# Altium PCB ArduinoProMiniPCB.PcbDoc
Units mil, origin at the board's own origin, x right, y up, seen from the top; angles counter-clockwise.
Board outline 6000 x 4000 mil, 2 copper layers (Top Layer, Bottom Layer); 50 components, 43 nets, 167 pads, 0 vias.
Unrouted connection lines stored in the file: 67.
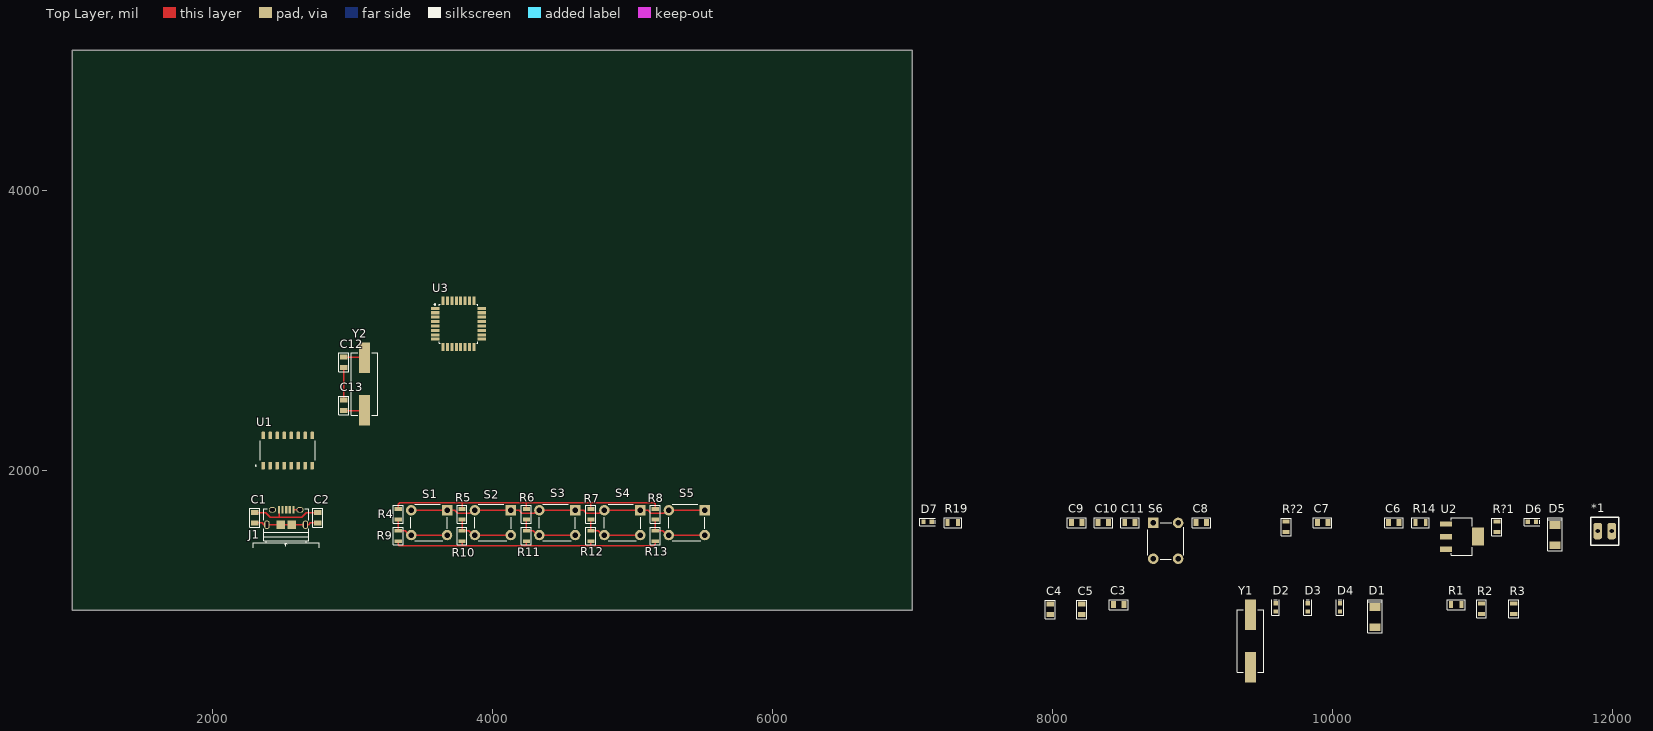
[diagram p0: Top Layer view]
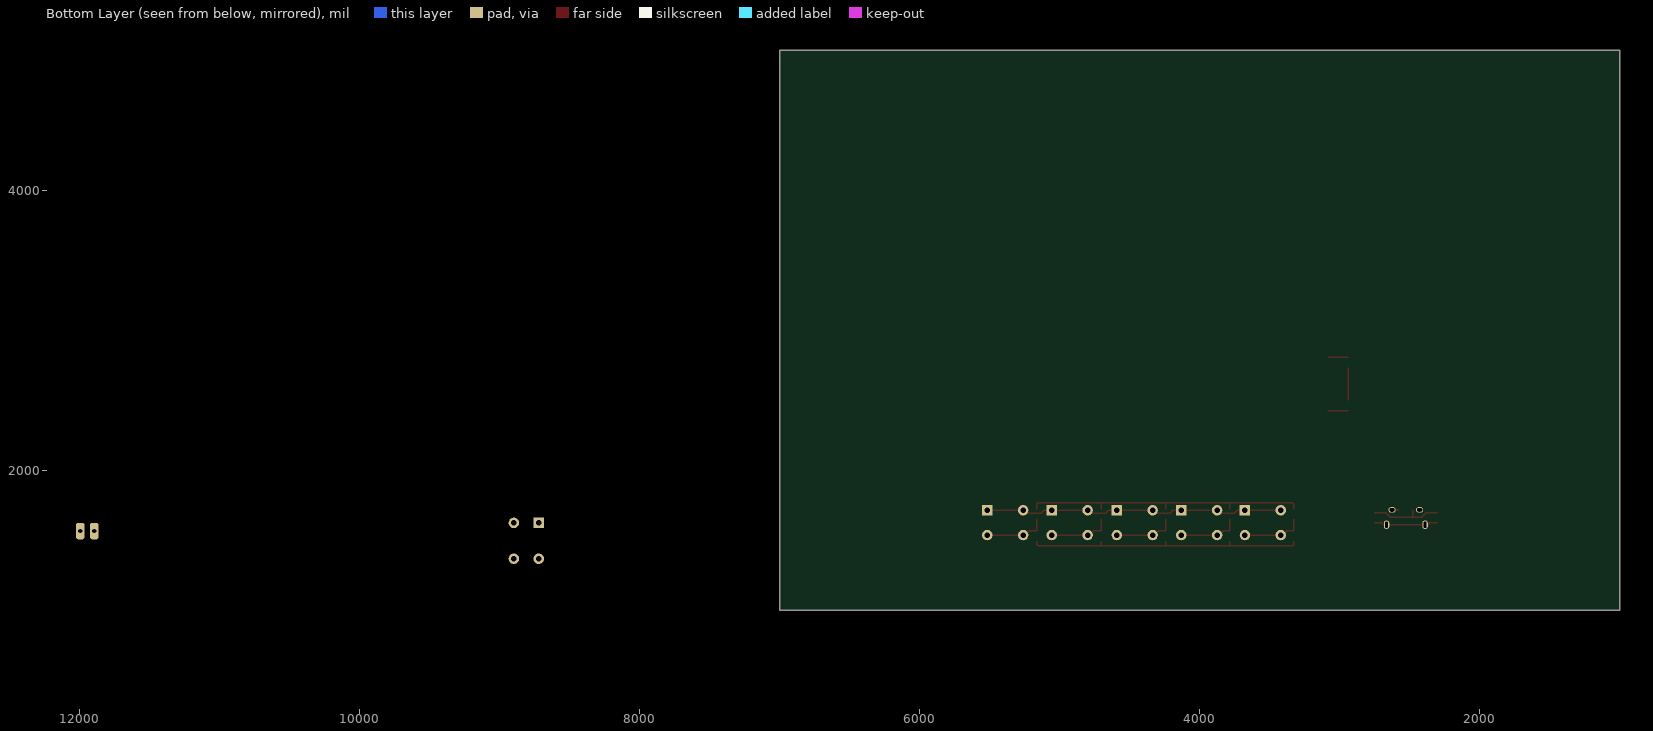
[diagram p1: Bottom Layer view, seen from below]

## Layer stack, top to bottom
Top Solder: solder mask 0.4, Solder Resist, Dk 3.5
Top Layer: signal copper 1.4
Dielectric 1: dielectric 12.6, FR-4, Dk 4.8
Bottom Layer: signal copper 1.4
Bottom Solder: solder mask 0.4, Solder Resist, Dk 3.5

## Board outline
1000,1000 7000,1000 7000,5000 1000,5000

## Design rules (kind name [scope] priority, off if disabled: settings)
Clearance [All] p1: gap=10 ignorepadtopadclearanceinfootprint=FALSE
PolygonConnect [All] p1: connectstyle=Relief reliefconductorwidth=10 reliefentries=4 polygonreliefangle="90 Angle" airgapwidth=10
RoutingVias [All] p1: holewidth=28 width=50 viastyle="Through Hole" minholewidth=28 minwidth=50 maxholewidth=28 maxwidth=50
SolderMaskExpansion [All] p1: expansion=4 istentingtop=FALSE
SupplyNets "Schematic Supply Nets_1" [InNet('GND')] p1: voltage=0.000
SupplyNets "Schematic Supply Nets" [InNet('+5')] p2: voltage=0.000
Width [All] p1: maxlimit=10 minlimit=10 preferedwidth=10
30 further rules are at their usual default settings.

## Components (designator, comment, footprint, x,y, rotation, side; value= is the part's Value field where it differs from the comment)
*1 "Power_Connector" Power_Connector 11895,1565 r0 top (schematic designator *)
C1 "100nF /50V" "C 0805" 2305,1660 r90 top
C2 "10uF/ 16V" "C 0805" 2755,1660 r90 top
C3 "100nF /50V" "C 0805" 8475,1040 r0 top (schematic designator C)
C4 "22pF /50V" "C 0805" 7985,1005 r90 top (schematic designator C)
C5 "22pF /50V" "C 0805" 8210,1005 r90 top (schematic designator C)
C6 "10uF/ 16V" "C 0805" 10440,1625 r0 top (schematic designator C3)
C7 "10uF/ 16V" "C 0805" 9930,1625 r0 top (schematic designator C4)
C8 "100nF /50V" "C 0805" 9065,1625 r0 top (schematic designator C5)
C9 "100nF /50V" "C 0805" 8175,1625 r0 top (schematic designator C6)
C10 "100nF /50V" "C 0805" 8365,1625 r0 top (schematic designator C7)
C11 "100nF /50V" "C 0805" 8555,1625 r0 top (schematic designator C8)
C12 "18pF /50V" "C 0805" 2940,2770 r90 top (schematic designator C9)
C13 "18pF /50V" "C 0805" 2940,2462.4 r270 top (schematic designator C10)
D1 "1N4148UR-1" DO-213AA 10305,950 r90 top (schematic designator D)
D2 "LED RED" "LED 0603" 9595,1020 r90 top (schematic designator D)
D3 "LED RED" "LED 0603" 9825,1020 r90 top (schematic designator D)
D4 "LED BLUE" "LED 0603" 10055,1020 r90 top (schematic designator D)
D5 "1N4148UR-1" DO-213AA 11590,1535 r90 top (schematic designator D1)
D6 "LED Blue" "LED 0603" 11425,1630 r0 top (schematic designator D2)
D7 "LED WHITE" "LED 0603" 7110,1630 r0 top (schematic designator D3)
J1 "10118194-0001LF" 10118194-0001LF 2529.37,1663.15 r0 top
R1 "330R" "R 0805" 10885,1040 r0 top (schematic designator R)
R2 "330R" "R 0805" 11065,1010 r90 top (schematic designator R)
R3 "330R" "R 0805" 11295,1010 r90 top (schematic designator R)
R4 "10kR" "R 0805" 3330,1685 r90 top (schematic designator R1)
R5 "10kR" "R 0805" 3785,1685 r90 top (schematic designator R2)
R6 "10kR" "R 0805" 4245,1685 r90 top (schematic designator R3)
R7 "10kR" "R 0805" 4705,1685 r90 top (schematic designator R4)
R8 "10kR" "R 0805" 5165,1685 r90 top (schematic designator R5)
R9 "10kR" "R 0805" 3330,1530 r90 top (schematic designator R6)
R10 "10kR" "R 0805" 3785,1530 r90 top (schematic designator R7)
R11 "10kR" "R 0805" 4245,1530 r90 top (schematic designator R8)
R12 "10kR" "R 0805" 4705,1530 r90 top (schematic designator R9)
R13 "10kR" "R 0805" 5165,1530 r90 top (schematic designator R10)
R14 "330R" "R 0805" 10630,1625 r0 top (schematic designator R11)
R19 "330R" "R 0805" 7290,1625 r0 top (schematic designator R16)
R?1 "10kR" "R 0805" 11175,1595 r90 top (schematic designator R?)
R?2 "10kR" "R 0805" 9670,1595 r90 top (schematic designator R?)
S1 "1825910-6" 1825910-6 3550,1625 r270 top
S2 "1825910-6" 1825910-6 4005,1625 r270 top
S3 "1825910-6" 1825910-6 4465,1625 r270 top
S4 "1825910-6" 1825910-6 4930,1625 r270 top
S5 "1825910-6" 1825910-6 5390,1625 r270 top
S6 "1825910-6" 1825910-6 8810,1495 r0 top
U1 "CH340G" SOIC127P600X180-16N 2540,2140 r90 top (schematic designator U)
U2 "LM1117MPX33NOPB" SOT223 10925,1525 r0 top (schematic designator U1)
U3 "ATMEGA328P-AUR" TQFP-32 3760,3045 r0 top (schematic designator U2)
Y1 "12MHz" CSM-7X 9415,780 r90 top (schematic designator Y)
Y2 "8MHz" CSM-7X 3090,2615 r270 top (schematic designator Y1)

## Footprints (in the part's own frame and the unit in brackets; to place one, negate y for a bottom-side part, rotate by r counter-clockwise, add the part's x,y. Pads: shape width x height; smd on the part's side, far side on the other; paste and mask are expansions set on the pad)
1825910-6 [mm]
  rect 1.9x1.9 / inner rect 19x1.9 / far side rect 1.9x1.9 hole 1: 1(-2.25,3.25)
  round 1.9 / inner oval 19x1.9 / far side round 1.9 hole 1: 2(-2.25,-3.25) 3(2.25,-3.25) 4(2.25,3.25)
  silkscreen extent -3.3,-3.3 3.3,3.3, body extent -3,-3.9 2.99,3.9, height 5
10118194-0001LF [mm]
  rect 0.4x1.35 smd mask+0.06: 1(-1.3,1.35) 2(-0.65,1.35) 3(0,1.35) 4(0.65,1.35) 5(1.3,1.35)
  oval 1.3x1 hole 0.6 slot 0.9 at 0 deg mask+0.06: 6(-2.5,1.35) 7(2.5,1.35)
  oval 1x1.55 hole 0.5 slot 1.15 at 90 deg mask+0.06: 8(-3.5,-1.35) 9(3.5,-1.35)
  rect 1.5x1.5 smd mask+0.06: 10(-1,-1.35) 11(1,-1.35)
  silkscreen extent -6,-5.55 6,1.55, body extent -4.05,-4.2 4,1.5, height 2.77
"C 0805" [mm]
  rect 0.9x1.3 smd: 1(-0.95,0) 2(0.95,0)
  silkscreen extent -1.7,-0.9 1.7,0.9, body extent -1,-0.65 1,0.64, height 1.3
CSM-7X [mm]
  rect 5.5x2 smd: 1(-4.75,0) 2(4.75,0)
  silkscreen extent -5.7,-2.4 5.7,2.4, body extent -6.6,-2.4 6.6,2.4, height 4.31
DO-213AA [mm]
  rect 1.4x2.03 smd: 1(-1.84,0) 2(1.84,0)
  silkscreen extent -2.8,-1.3 3.2,1.3, body extent -1.82,-0.8 1.88,0.8, height 1.6
"LED 0603" [mm]
  rect 0.8x0.8 smd: 1(-0.75,0) 2(0.75,0)
  silkscreen extent -1.4,-0.7 1.4,0.7, body extent -0.83,-0.37 0.83,0.36, height 0.68
Power_Connector [mil]
  rrect50% 60x118.11 hole 30 unplated paste-99999: 1(0,0)
  rrect50% 60x118.11 hole 30 unplated: 2(100,0)
  silkscreen extent -50,-100 150,100
"R 0805" [mm]
  rect 0.7x1.3 smd: 1(-0.95,0) 2(0.95,0)
  silkscreen extent -1.6,-0.9 1.6,0.9, body extent -1,-0.62 1,0.62, height 0.61
SOIC127P600X180-16N [mm]
  rrect25% 1.31x0.62 smd: 1(-2.75,4.445) 2(-2.75,3.175) 3(-2.75,1.905) 4(-2.75,0.635) 5(-2.75,-0.635) 6(-2.75,-1.905) 7(-2.75,-3.175) 8(-2.75,-4.445) 9(2.75,-4.445) 10(2.75,-3.175) 11(2.75,-1.905) 12(2.75,-0.635) 13(2.75,0.635) 14(2.75,1.905) 15(2.75,3.175) 16(2.75,4.445)
  silkscreen extent -2.85,-5 1.78,5.85, body extent -3,-5 3,5, height 1.8
SOT223 [mm]
  rect 2.15x0.95 smd: 1(-2.9,2.3) 2(-2.9,0) 3(-2.9,-2.3)
  rect 2.15x3.25 smd: 4(2.9,0)
  silkscreen extent -1.9,-3.4 1.9,3.4, body extent -3.5,-3.25 3.5,3.25, height 1.66
TQFP-32 [mm]
  rect 1.5x0.55 smd mask+0.06: 1(-4.2,2.8) 2(-4.2,2) 3(-4.2,1.2) 4(-4.2,0.4) 5(-4.2,-0.4) 6(-4.2,-1.2) 7(-4.2,-2) 8(-4.2,-2.8) 17(4.2,-2.8) 18(4.2,-2) 19(4.2,-1.2) 20(4.2,-0.4) 21(4.2,0.4) 22(4.2,1.2) 23(4.2,2) 24(4.2,2.8)
  rect 0.55x1.5 smd mask+0.06: 9(-2.8,-4.2) 10(-2,-4.2) 11(-1.2,-4.2) 12(-0.4,-4.2) 13(0.4,-4.2) 14(1.2,-4.2) 15(2,-4.2) 16(2.8,-4.2) 25(2.8,4.2) 26(2,4.2) 27(1.2,4.2) 28(0.4,4.2) 29(-0.4,4.2) 30(-1.2,4.2) 31(-2,4.2) 32(-2.8,4.2)
  silkscreen extent -4.4,-3.5 3.5,3.6, body extent -4.51,-4.51 4.51,4.51, height 1.1

## Part data
C1 C3 C8 C9 C10 C11: library part C0805C104Z5VACTU, "KEMET         C0805C104Z5VACTU.             CERAMIC CAPACITOR, 0.1UF, 50V, Y5V, +80,-20%, 0805", Capacitance=100nF, Case Code (Imperial)=0805, Case Code (Metric)=2012, Dielectric=Y5V, Dielectric Material=Ceramic, Manufacturer 1=KEMET, Max Operating Temperature=85°C, Min Operating Temperature=-30°C, Package Quantity=1, Supplier Part Number 1=399-1177-1-ND, Tolerance=80%, Voltage=50V, Case/Package=0805, Category="Ceramic Capacitors", ComponentLink1Description=https://datasheet.ciiva.com/14597/70095383-14597846.pdf?src-supplier=Allied+Electronics, ComponentLink1URL=https://datasheet.ciiva.com/14597/70095383-14597846.pdf?src-supplier=Allied+Electronics, ComponentLink2Description=https://datasheet.ciiva.com/18219/getdatasheetpartid-37101-18219255.pdf?src-supplier=Verical, ComponentLink2URL=https://datasheet.ciiva.com/18219/getdatasheetpartid-37101-18219255.pdf?src-supplier=Verical, ComponentLink3Description=https://datasheet.ciiva.com/26847/getdatasheetpartid-321176-26847799.pdf?src-supplier=Verical, ComponentLink3URL=https://datasheet.ciiva.com/26847/getdatasheetpartid-321176-26847799.pdf?src-supplier=Verical, ComponentLink4Description=https://datasheet.ciiva.com/14608/70095383-14608251.pdf?src-supplier=Allied+Electronics, ComponentLink4URL=https://datasheet.ciiva.com/14608/70095383-14608251.pdf?src-supplier=Allied+Electronics, ComponentLink5Description=https://datasheet.ciiva.com/7842/1470417-7842543.pdf?src-supplier=Element14, ComponentLink5URL=https://datasheet.ciiva.com/7842/1470417-7842543.pdf?src-supplier=Element14, Depth=1.25mm, Dissipation Factor=5%, Height=0.9mm, Lead Free="Lead Free", Lead Pitch=0.75mm, Length=2mm, Manufacturer Part Number 1=C0805C104Z5VACTU, Mount="Surface Mount,PCB", Number of Pins=2, Packaging="Tape and Reel", Pricing 1="1=0.10000, 10=0.05700, 100=0.02540, 500=0.01818, 1000=0.01428 (USD)", Radiation Hardening=No, REACH SVHC="No SVHC", RoHS=Yes, Stock 1=1301254, Supplier 1=Digi-Key, Termination=SMD/SMT, Thickness=0.039inch, Voltage Rating=50V, Voltage Rating (DC)=50V, Width=0.049inch
C2 C6 C7: library part C0805C106K4PACTU, "0805 C 10uF Ceramic Multilayer Capacitor; 16 VDC; +85degC; X5R Dielec; +/-10%", Capacitance=10uF, Case Code (Imperial)=0805, Case Code (Metric)=2012, Dielectric=X5R, Dielectric Material=Ceramic, Manufacturer 1=KEMET, Max Operating Temperature=85°C, Min Operating Temperature=-55°C, Package Quantity=1, Supplier Part Number 1=399-8012-6-ND, Tolerance=10%, Voltage=16V, Case/Package=0805, Category="Ceramic Capacitors", ComponentLink1Description=https://datasheet.ciiva.com/7842/1732713-7842196.pdf?src-supplier=Element14, ComponentLink1URL=https://datasheet.ciiva.com/7842/1732713-7842196.pdf?src-supplier=Element14, ComponentLink2Description=https://datasheet.ciiva.com/28682/1831760-28682305.pdf?src-supplier=Element14, ComponentLink2URL=https://datasheet.ciiva.com/28682/1831760-28682305.pdf?src-supplier=Element14, ComponentLink3Description=https://datasheet.ciiva.com/11787/0900766b8116eb59-11787314.pdf?src-supplier=RSComponents, ComponentLink3URL=https://datasheet.ciiva.com/11787/0900766b8116eb59-11787314.pdf?src-supplier=RSComponents, ComponentLink4Description=https://datasheet.ciiva.com/7842/1732713-7842197.pdf?src-supplier=Element14, ComponentLink4URL=https://datasheet.ciiva.com/7842/1732713-7842197.pdf?src-supplier=Element14, ComponentLink5Description=https://datasheet.ciiva.com/26847/getdatasheetpartid-110990-26847815.pdf?src-supplier=Verical, ComponentLink5URL=https://datasheet.ciiva.com/26847/getdatasheetpartid-110990-26847815.pdf?src-supplier=Verical, Contact Plating=Tin,Matte, Depth=1.25mm, Dissipation Factor=5%, Height=1.25mm, Lead Free="Lead Free", Length=2mm, Manufacturer Part Number 1=C0805C106K4PACTU, Mount="Surface Mount", Number of Pins=2, Packaging="Tape and Reel", Pricing 1="1=0.19000, 10=0.13100, 100=0.06630, 500=0.04538, 1000=0.04015 (USD)", Radiation Hardening=No, REACH SVHC="No SVHC", RoHS=Yes, Stock 1=383500, Supplier 1=Digi-Key, Termination=SMD/SMT, Thickness=0.055inch, Voltage Rating=16V, Voltage Rating (DC)=16V, Width=0.049inch
C4 C5 C12 C13: library part CC0805JRNPO9BN180, "CAP CER 18PF 50V C0G/NPO 0805", Capacitance=18pF, Case Code (Imperial)=0805, Case Code (Metric)=2012, Dielectric=C0G, Insulation Resistance=10GR, Manufacturer 1=Yageo, Max Operating Temperature=125°C, Min Operating Temperature=-55°C, Package Quantity=4000, Supplier Part Number 1=311-1102-1-ND, Tolerance=5%, Voltage Rating=50V, Case/Package=0805, Category="Ceramic Capacitors", ComponentLink1Description=https://datasheet.ciiva.com/26862/getdatasheetpartid-403658-26862933.pdf?src-supplier=Verical, ComponentLink1URL=https://datasheet.ciiva.com/26862/getdatasheetpartid-403658-26862933.pdf?src-supplier=Verical, ComponentLink2Description=https://datasheet.ciiva.com/144/mlccorderingcode-144754.pdf?src-supplier=Digi-Key, ComponentLink2URL=https://datasheet.ciiva.com/144/mlccorderingcode-144754.pdf?src-supplier=Digi-Key, ComponentLink3Description=https://datasheet.ciiva.com/11586/upy-gp-np0-16v-to-50v-8-11586203.pdf?src-supplier=Avnet, ComponentLink3URL=https://datasheet.ciiva.com/11586/upy-gp-np0-16v-to-50v-8-11586203.pdf?src-supplier=Avnet, ComponentLink4Description=https://datasheet.ciiva.com/144/mlccorderingcode-144755.pdf?src-supplier=Digi-Key, ComponentLink4URL=https://datasheet.ciiva.com/144/mlccorderingcode-144755.pdf?src-supplier=Digi-Key, ComponentLink5Description=https://datasheet.ciiva.com/144/mlccorderingcode-144756.pdf?src-supplier=Digi-Key, ComponentLink5URL=https://datasheet.ciiva.com/144/mlccorderingcode-144756.pdf?src-supplier=Digi-Key, ComponentLink6Description=https://datasheet.ciiva.com/29241/445366-da-01-en-kerko-chip-0805-np0-18pf-5proz50v-g-29241990.pdf?src-supplier=Conrad, ComponentLink6URL=https://datasheet.ciiva.com/29241/445366-da-01-en-kerko-chip-0805-np0-18pf-5proz50v-g-29241990.pdf?src-supplier=Conrad, Composition=Ceramic, Depth=1.25mm, Height=0.6mm, Lead Free="Lead Free", Length=2mm, Manufacturer Part Number 1=CC0805JRNPO9BN180, Material=Ceramic, Mount="Surface Mount", Packaging="Tape and Reel", Pricing 1="1=0.11000, 10=0.07900, 100=0.03520, 500=0.02514, 1000=0.01975 (USD)", Radiation Hardening=No, RoHS=Yes, Stock 1=89807, Supplier 1=Digi-Key, Termination=SMD/SMT, Thickness=0.024inch, Voltage Rating (DC)=50V, Width=0.049inch
D1 D5: "Diode Switching 75V 0.2A 2-Pin DO-213AA", Average Rectified Current=200mA, Forward Voltage=1.2V, Manufacturer 1=Microsemi, Max Operating Temperature=175°C, Max Repetitive Reverse Voltage (Vrrm)=75V, Min Operating Temperature=-65°C, Peak Non-Repetitive Surge Current=2A, Peak Reverse Current=500nA, Supplier Part Number 1=1N4148UR-1-ND, Category="Rectifier Diodes", ComponentLink1Description=https://datasheet.ciiva.com/3304/lds-0281-1-3304223.pdf?src-supplier=Avnet, ComponentLink1URL=https://datasheet.ciiva.com/3304/lds-0281-1-3304223.pdf?src-supplier=Avnet, Element Configuration=Single, Forward Current=200mA, Lead Free="Lead Free", Manufacturer Part Number 1=1N4148UR-1, Max Reverse Voltage (DC)=75V, Mount="Surface Mount", Number of Pins=2, Packaging=Bulk, Pricing 1="1=1.50000, 10=1.35200, 100=1.08630, 500=0.89250, 1000=0.73950, 2500=0.71400 (USD)", Radiation Hardening=No, Reverse Recovery Time=5ns, RoHS=Yes, Stock 1=470, Supplier 1=Digi-Key
D2 D3 D4 D7: library part IN-S63AT5UW, "LED WHITE CLEAR 0603 SMD", Manufacturer 1=Inolux, Supplier Part Number 1=1830-1063-1-ND, Category=LEDs, ComponentLink1Description=http://www.inolux-corp.com/datasheet/SMDLED/Mono%20Color%20Top%20View/IN-S63AT%20Series_V1.1.pdf?src-supplier=Digi-Key, ComponentLink1URL=http://www.inolux-corp.com/datasheet/SMDLED/Mono%20Color%20Top%20View/IN-S63AT%20Series_V1.1.pdf?src-supplier=Digi-Key, Manufacturer Part Number 1=IN-S63AT5UW, Pricing 1="1=0.35000, 10=0.25400, 100=0.12040, 500=0.08026, 1000=0.06286 (USD)", RoHS=No, Stock 1=55075, Supplier 1=Digi-Key
D6: library part LTST-C194TBKT, "LED BLUE CLEAR SMD", Case Code (Imperial)=0603, Case Code (Metric)=1608, Color=Blue, Forward Current=5mA, Forward Voltage=3.8V, Lens Color=Colorless, Manufacturer 1="Vishay Lite-On", Max Operating Temperature=80°C, Min Operating Temperature=-20°C, Package Quantity=1, Power Dissipation=76mW, Reverse Voltage=5V, Supplier Part Number 1=160-1837-1-ND, Test Current=20mA, Case/Package=0603, Category=LEDs, ComponentLink1Description=https://datasheet.ciiva.com/2115/ltst-c194tbkt-2115056.pdf?src-supplier=Digi-Key, ComponentLink1URL=https://datasheet.ciiva.com/2115/ltst-c194tbkt-2115056.pdf?src-supplier=Digi-Key, ComponentLink2Description=https://datasheet.ciiva.com/4689/lite-on-ltst-c194tbkt-187209-4689177.pdf?src-supplier=Mouser, ComponentLink2URL=https://datasheet.ciiva.com/4689/lite-on-ltst-c194tbkt-187209-4689177.pdf?src-supplier=Mouser, ComponentLink3Description=https://datasheet.ciiva.com/2115/s-110-ltst-c194tbkt-2115057.pdf?src-supplier=Digi-Key, ComponentLink3URL=https://datasheet.ciiva.com/2115/s-110-ltst-c194tbkt-2115057.pdf?src-supplier=Digi-Key, Depth=0.8mm, Dominant Wavelength=468nm, Height=0.35mm, Illumination Color=Blue, Lead Free="Lead Free", Length=1.6mm, Lens Style=Rectangular,Diffused,Colorless, Lens Transparency=Clear, Luminous Intensity=180mcd, Manufacturer Part Number 1=LTST-C194TBKT, Mount="Surface Mount", Number of Elements=1, Number of LEDs=1, Number of Pins=2, Packaging="Tape and Reel", Pricing 1="1=0.45000, 10=0.32000, 100=0.14240, 500=0.09968, 1000=0.08188, 2500=0.07120 (USD)", Radiation Hardening=No, RoHS=Yes, Stock 1=93526, Supplier 1=Digi-Key, Viewing Angle=130°, Width=0.8mm
J1: "CONN RCPT USB2.0 MICRO B SMD R/A", Color=Black, Current Rating=1.8A, Flammability Rating="UL94 V-0", Insulation Resistance=1GR, Manufacturer 1="Amphenol FCI", Max Operating Temperature=85°C, Max Voltage Rating (AC)=100V, Min Operating Temperature=-55°C, Package Quantity=9600, Supplier Part Number 1=609-4618-1-ND, Category=Connectors, ComponentLink1Description=https://datasheet.ciiva.com/4598/10118194ac-197217-4598807.pdf?src-supplier=Mouser, ComponentLink1URL=https://datasheet.ciiva.com/4598/10118194ac-197217-4598807.pdf?src-supplier=Mouser, ComponentLink2Description=https://datasheet.ciiva.com/26945/getdatasheetpartid-418619-26945695.pdf?src-supplier=Verical, ComponentLink2URL=https://datasheet.ciiva.com/26945/getdatasheetpartid-418619-26945695.pdf?src-supplier=Verical, ComponentLink3Description=https://datasheet.ciiva.com/851/10118194-851110.pdf?src-supplier=Digi-Key, ComponentLink3URL=https://datasheet.ciiva.com/851/10118194-851110.pdf?src-supplier=Digi-Key, ComponentLink4Description=https://datasheet.ciiva.com/851/10118194-851111.pdf?src-supplier=Digi-Key, ComponentLink4URL=https://datasheet.ciiva.com/851/10118194-851111.pdf?src-supplier=Digi-Key, Connector Type=USB,Receptacle, Contact Material="Copper Alloy", Contact Plating=Gold, Depth=5mm, Features=Shielded, Gender=Receptacle, Housing Material=Polymer, Lead Free="Lead Free", Length=8.05mm, Manufacturer Part Number 1=10118194-0001LF, Mount="Surface Mount,Horizontal", Number of Contacts=5, Number of Ports=1, Number of Terminals=5, Orientation="Right Angle", Packaging="Tape and Reel", Pitch=0.65mm, Pricing 1="1=0.43000, 10=0.40500, 25=0.36440, 50=0.32400, 100=0.31040, 250=0.28344, 500=0.26994 (USD)", Radiation Hardening=No, RoHS=Yes, Stock 1=31557, Supplier 1=Digi-Key, Termination=Solder
R1 R2 R3 R14 R19: library part RC0805JR-07330RL, "RES SMD 330 OHM 5% 1/8W 0805", Case Code (Imperial)=0805, Case Code (Metric)=2012, Manufacturer 1=Yageo, Max Operating Temperature=155°C, Min Operating Temperature=-55°C, Package Quantity=5000, Power Rating=125mW, Supplier Part Number 1=311-330ARCT-ND, Temperature Coefficient=100ppm/°C, Tolerance=5%, Voltage Rating=150V, Case/Package=0805, Category="Chip SMD Resistors", ComponentLink1Description=https://datasheet.ciiva.com/7941/442941-7941941.pdf?src-supplier=Element14, ComponentLink1URL=https://datasheet.ciiva.com/7941/442941-7941941.pdf?src-supplier=Element14, ComponentLink2Description=https://datasheet.ciiva.com/7941/442941-7941942.pdf?src-supplier=Element14, ComponentLink2URL=https://datasheet.ciiva.com/7941/442941-7941942.pdf?src-supplier=Element14, ComponentLink3Description=https://datasheet.ciiva.com/12555/rc0805-257173-12555078.pdf?src-supplier=Mouser, ComponentLink3URL=https://datasheet.ciiva.com/12555/rc0805-257173-12555078.pdf?src-supplier=Mouser, ComponentLink4Description=https://datasheet.ciiva.com/17008/rc0805-17008395.pdf?src-supplier=Future+Electronics, ComponentLink4URL=https://datasheet.ciiva.com/17008/rc0805-17008395.pdf?src-supplier=Future+Electronics, ComponentLink5Description=https://datasheet.ciiva.com/46395/444164-46395119.pdf?src-supplier=Element14, ComponentLink5URL=https://datasheet.ciiva.com/46395/444164-46395119.pdf?src-supplier=Element14, Composition="Thick Film", Contact Plating=Tin,Matte,Lead, Depth=1.25mm, Height=0.5mm, Lead Free="Lead Free", Length=2mm, Manufacturer Part Number 1=RC0805JR-07330RL, Military Standard=Not, Packaging="Tape and Reel", Pricing 1="1=0.10000, 10=0.03500, 100=0.01400, 1000=0.00631, 2500=0.00548 (USD)", Radiation Hardening=No, REACH SVHC="No SVHC", Resistance=330R, RoHS=Yes, Supplier 1=Digi-Key, Termination=SMD/SMT, Width=1.25mm
  R1 R2 R3 R19: Stock 1=2419541
  R14: Stock 1=2403992
R4 R5 R6 R7 R8 R9 R10 R11 R12 R13 R?1 R?2: library part RC0805FR-0710KL, "RES SMD 10K OHM 1% 1/8W 0805", Case Code (Imperial)=0805, Case Code (Metric)=2012, Manufacturer 1=Yageo, Max Operating Temperature=155°C, Max Power Dissipation=125mW, Min Operating Temperature=-55°C, Package Quantity=1, Supplier Part Number 1=311-10.0KCRCT-ND, Temperature Coefficient=100ppm/°C, Tolerance=1%, Voltage Rating=150V, Case/Package=0805, Category="Chip SMD Resistors", ComponentLink1Description=https://datasheet.ciiva.com/11808/0900766b8106beab-11808151.pdf?src-supplier=RSComponents, ComponentLink1URL=https://datasheet.ciiva.com/11808/0900766b8106beab-11808151.pdf?src-supplier=RSComponents, ComponentLink2Description=https://datasheet.ciiva.com/12669/rc0805-12669688.pdf?src-supplier=Mouser, ComponentLink2URL=https://datasheet.ciiva.com/12669/rc0805-12669688.pdf?src-supplier=Mouser, ComponentLink3Description=https://datasheet.ciiva.com/46447/444164-46447563.pdf?src-supplier=Element14, ComponentLink3URL=https://datasheet.ciiva.com/46447/444164-46447563.pdf?src-supplier=Element14, ComponentLink4Description=https://datasheet.ciiva.com/2456/pyu-r-int-thick-7-2456972.pdf?src-supplier=Digi-Key, ComponentLink4URL=https://datasheet.ciiva.com/2456/pyu-r-int-thick-7-2456972.pdf?src-supplier=Digi-Key, ComponentLink5Description=https://datasheet.ciiva.com/2456/pyu-r-int-thick-7-2456973.pdf?src-supplier=Digi-Key, ComponentLink5URL=https://datasheet.ciiva.com/2456/pyu-r-int-thick-7-2456973.pdf?src-supplier=Digi-Key, ComponentLink6Description=https://datasheet.ciiva.com/2456/pyu-r-int-thick-7-2456974.pdf?src-supplier=Digi-Key, ComponentLink6URL=https://datasheet.ciiva.com/2456/pyu-r-int-thick-7-2456974.pdf?src-supplier=Digi-Key, ComponentLink7Description=https://datasheet.ciiva.com/16747/rc0805-16747087.pdf?src-supplier=Future+Electronics, ComponentLink7URL=https://datasheet.ciiva.com/16747/rc0805-16747087.pdf?src-supplier=Future+Electronics, Composition="Thick Film", Depth=1.25mm, Features="Moisture Resistant", Height=0.024inch, Lead Free="Lead Free", Length=2mm, Manufacturer Part Number 1=RC0805FR-0710KL, Military Standard=Not, Number of Terminations=2, Packaging="Tape and Reel", Power Rating=125mW, Pricing 1="1=0.10000, 10=0.03600, 100=0.01470, 1000=0.00660, 2500=0.00573 (USD)", REACH SVHC=Unknown, Resistance=10kR, RoHS=Yes, Stock 1=37458313, Supplier 1=Digi-Key, Termination=SMD/SMT, Width=0.049inch
S1 S2 S3 S4 S5 S6: "ALCOSWITCH - TE CONNECTIVITY - 1825910-6 - TACT SWITCH, SPST, 0.05A, 24VDC, SOLDER", Contact Current Rating=50mA, Contact Resistance=100mR, Manufacturer 1="TE Connectivity Alcoswitch", Max Operating Temperature=85°C, Max Voltage Rating (DC)=24V, Min Operating Temperature=-35°C, Operating Force=160gf, Package Quantity=750, Supplier Part Number 1=450-1650-ND, Actuator Length=0.055inch, Actuator Material=PBT, Actuator Type=Standard, Category="Pushbutton Switches", ComponentLink1Description=https://datasheet.ciiva.com/30199/1825910-6rqpn1825910-6-30199520.pdf?src-supplier=Onlinecomponents.com, ComponentLink1URL=https://datasheet.ciiva.com/30199/1825910-6rqpn1825910-6-30199520.pdf?src-supplier=Onlinecomponents.com, ComponentLink2Description=https://datasheet.ciiva.com/15184/getdatasheetpartid-395915-15184509.pdf?src-supplier=Verical, ComponentLink2URL=https://datasheet.ciiva.com/15184/getdatasheetpartid-395915-15184509.pdf?src-supplier=Verical, Contact Material="Copper Alloy", Contact Plating=Silver, Electrical Life=100000Cycles, ELV=Compliant, Illumination Type=Non-Illuminated,Illuminated, Lead Free="Lead Free", Length=5.99mm, Manufacturer Part Number 1=1825910-6, Max Current Rating=50mA, Mechanical Life=100000Cycles, Mount="Through Hole", Orientation=Straight, Packaging="Loose Piece", Pricing 1="1=0.10000, 10=0.10100, 25=0.09760, 50=0.09400, 100=0.08880, 250=0.08352, 500=0.08006, 1000=0.06091, 5000=0.05047 (USD)", REACH SVHC=Unknown, RoHS=Yes, Stock 1=81468, Supplier 1=Digi-Key, Switch Function=Off-Mom, Switch Travel=0.25mm, Termination="PC Pins", Throw Configuration=SPST, Type=Switch
U1: "USB Interface Integrated Circuit", Package=None, Availability="Not in stock", Check_prices=https://www.snapeda.com/parts/Ch340G/WCH/view-part/?ref=eda, MF=WCH, MP=Ch340G, Price=None, SnapEDA_Link=https://www.snapeda.com/parts/Ch340G/WCH/view-part/?ref=snap
U2: "IC REG LIN 3.3V 800MA SOT223-4", Case/Package=SOT-223, Current Rating=800mA, Dropout Voltage=1.2V, Manufacturer 1="TI National Semiconductor", Max Input Voltage=15V, Max Operating Temperature=125°C, Min Input Voltage=2.6V, Min Operating Temperature=0°C, Nominal Output Voltage=3.3V, Output Voltage Accuracy=1%, Package Quantity=2000, Quiescent Current=10mA, Supplier Part Number 1=LM1117MPX-3.3/NOPBTR-ND, Accuracy=1%, Category="Voltage Regulators - Linear", ComponentLink1Description=https://datasheet.ciiva.com/34302/1282978-34302146.pdf?src-supplier=Jameco, ComponentLink1URL=https://datasheet.ciiva.com/34302/1282978-34302146.pdf?src-supplier=Jameco, ComponentLink2Description=https://datasheet.ciiva.com/15111/getdatasheetpartid-97931-15111685.pdf?src-supplier=Verical, ComponentLink2URL=https://datasheet.ciiva.com/15111/getdatasheetpartid-97931-15111685.pdf?src-supplier=Verical, ComponentLink3Description=https://datasheet.ciiva.com/6596/lm1117-n-6596790.pdf?src-supplier=Digi-Key, ComponentLink3URL=https://datasheet.ciiva.com/6596/lm1117-n-6596790.pdf?src-supplier=Digi-Key, ComponentLink4Description=https://datasheet.ciiva.com/25980/lm1117-n-25980326.pdf?src-supplier=Avnet+Europe, ComponentLink4URL=https://datasheet.ciiva.com/25980/lm1117-n-25980326.pdf?src-supplier=Avnet+Europe, ComponentLink5Description=https://datasheet.ciiva.com/3223/lm1117-n-3223528.pdf?src-supplier=Avnet, ComponentLink5URL=https://datasheet.ciiva.com/3223/lm1117-n-3223528.pdf?src-supplier=Avnet, ComponentLink6Description=https://datasheet.ciiva.com/22728/lm1117-n-22728808.pdf?src-supplier=Element14, ComponentLink6URL=https://datasheet.ciiva.com/22728/lm1117-n-22728808.pdf?src-supplier=Element14, ComponentLink7Description=https://datasheet.ciiva.com/3223/lm1117-n-3223529.pdf?src-supplier=Avnet, ComponentLink7URL=https://datasheet.ciiva.com/3223/lm1117-n-3223529.pdf?src-supplier=Avnet, ComponentLink8Description=https://datasheet.ciiva.com/6596/lm1117-n-6596793.pdf?src-supplier=Digi-Key, ComponentLink8URL=https://datasheet.ciiva.com/6596/lm1117-n-6596793.pdf?src-supplier=Digi-Key, Height=1.6mm, Lead Free="Lead Free", Length=6.5mm, Manufacturer Part Number 1=LM1117MPX33NOPB, Max Output Current=800mA, Min Current Limit=800mA, Mount="Surface Mount", Number of Outputs=1, Number of Pins=4, Number of Regulators=1, Output Current=800mA, Output Type=Fixed, Output Voltage=3.3V, Packaging="Tape and Reel", Polarity=Positive, Radiation Hardening=No, REACH SVHC="No SVHC", RoHS=Yes, Supplier 1=Digi-Key, Width=3.56mm
U3: "MCU 8-bit ATmega AVR RISC 32KB Flash 2.5V/3.3V/5V 32-Pin TQFP T/R", Case/Package=A, Frequency=20MHz, Manufacturer 1="Microchip / Atmel", Max Operating Temperature=85°C, Max Supply Voltage=5.5V, Min Operating Temperature=-40°C, Min Supply Voltage=1.8V, Package Quantity=2000, Supplier Part Number 1=ATMEGA328P-AURCT-ND, Category=Microcontrollers, ComponentLink1Description=https://datasheet.ciiva.com/6641/atmega48a-pa-88a-pa-168a-pa-328-p-ds-ds40002061a-6641009.pdf?src-supplier=Digi-Key, ComponentLink1URL=https://datasheet.ciiva.com/6641/atmega48a-pa-88a-pa-168a-pa-328-p-ds-ds40002061a-6641009.pdf?src-supplier=Digi-Key, Contact Plating=Tin,Matte, Core Architecture=AVR, Data Bus Width=8b, Interface=I2C,SPI,UART,USART,2-Wire, Lead Free="Lead Free", Manufacturer Part Number 1=ATMEGA328P-AUR, Max Frequency=20MHz, Memory Size=32KB, Memory Type=FLASH, Mount="Surface Mount", Number of I/Os=23, Number of Pins=32, Number of Programmable I/O=23, Number of Timers/Counters=3, Oscillator Type=Internal, Packaging="Tape and Reel", Peripherals="Brown-out Detect/Reset,POR,PWM,WDT", Pricing 1="1=2.08000, 25=1.91000, 100=1.73000 (USD)", RAM Size=2KB, REACH SVHC="No SVHC", RoHS=Yes, Stock 1=12551, Supplier 1=Digi-Key, Watchdog Timer=Yes
Y1: library part ECS-80-18-5PX-TR, "CRYSTAL 8.0000MHZ 18PF SMD", ESR (Equivalent Series Resistance)=60R, Frequency=8MHz, Frequency Stability=50ppm, Frequency Tolerance=30ppm, Load Capacitance=18pF, Manufacturer 1="ECS International", Max Operating Temperature=70°C, Min Operating Temperature=-10°C, Package Quantity=1000, Supplier Part Number 1=XC1271CT-ND, Category=Crystals, ComponentLink1Description=https://datasheet.ciiva.com/852/csm-7x-852380.pdf?src-supplier=Digi-Key, ComponentLink1URL=https://datasheet.ciiva.com/852/csm-7x-852380.pdf?src-supplier=Digi-Key, ComponentLink2Description=https://datasheet.ciiva.com/852/csm-7x-852381.pdf?src-supplier=Digi-Key, ComponentLink2URL=https://datasheet.ciiva.com/852/csm-7x-852381.pdf?src-supplier=Digi-Key, ComponentLink3Description=https://datasheet.ciiva.com/852/csm-7x-852382.pdf?src-supplier=Digi-Key, ComponentLink3URL=https://datasheet.ciiva.com/852/csm-7x-852382.pdf?src-supplier=Digi-Key, Height=0.169inch, Lead Free="Lead Free", Length=0.449inch, Manufacturer Part Number 1=ECS-80-18-5PX-TR, Mount="Surface Mount", Packaging="Tape and Reel", Pricing 1="1=0.25000, 10=0.21000, 50=0.18860, 100=0.16760, 500=0.15926 (USD)", RoHS=Yes, Stock 1=6700, Supplier 1=Digi-Key, Termination=SMD/SMT, Tolerance=30ppm, Width=4.8mm
Y2: library part ECS-80-18-5PX-TR, "CRYSTAL 8.0000MHZ 18PF SMD", ESR (Equivalent Series Resistance)=60R, Frequency Stability=50ppm, Frequency Tolerance=30ppm, Load Capacitance=18pF, Manufacturer 1="ECS International", Max Operating Temperature=70°C, Min Operating Temperature=-10°C, Package Quantity=1000, Supplier Part Number 1=XC1271CT-ND, Category=Crystals, ComponentLink1Description=https://datasheet.ciiva.com/852/csm-7x-852380.pdf?src-supplier=Digi-Key, ComponentLink1URL=https://datasheet.ciiva.com/852/csm-7x-852380.pdf?src-supplier=Digi-Key, ComponentLink2Description=https://datasheet.ciiva.com/852/csm-7x-852381.pdf?src-supplier=Digi-Key, ComponentLink2URL=https://datasheet.ciiva.com/852/csm-7x-852381.pdf?src-supplier=Digi-Key, ComponentLink3Description=https://datasheet.ciiva.com/852/csm-7x-852382.pdf?src-supplier=Digi-Key, ComponentLink3URL=https://datasheet.ciiva.com/852/csm-7x-852382.pdf?src-supplier=Digi-Key, Frequency=8MHz, Height=0.169inch, Lead Free="Lead Free", Length=0.449inch, Manufacturer Part Number 1=ECS-80-18-5PX-TR, Mount="Surface Mount", Packaging="Tape and Reel", Pricing 1="1=0.25000, 10=0.21000, 50=0.18860, 100=0.16760, 500=0.15926 (USD)", RoHS=Yes, Stock 1=6700, Supplier 1=Digi-Key, Termination=SMD/SMT, Tolerance=30ppm, Width=4.8mm

## Nets (pads, with @x,y where several pads share a name; then routed paths per layer and width w, separated by ;. In a path a pad name is that pad's centre, name@x,y a point inside that pad or via, vN(x,y) a via of type N, cw(c..) or ccw(c..) an arc to the next point about the centre after c; other vN are vias at no path point)
+5: C1.2 C2.2 C6.2 C9.2 C10.2 D1.1 D5.1 D6.1 J1.1 R1.1 R2.1 R3.1 R4.2 R5.2 R6.2 R7.2 R8.2 U1.16 U2.2 U2.4 U3.4 U3.6 U3.18 | length 2572.8
  Top Layer w10: C1.2 2382.6,1697.4 2415,1665 2480,1665 ; J1.1 2478.19,1666.81 2480,1665 ; C2.2 2672.4,1697.4 2640,1665 2480,1665 ; R4.2 3330,1755 3340.98,1765.98 3785,1765.98 ; R5.2 3785,1765.98 ; R6.2 4245,1765.98 ; R7.2 4705,1762.56 4701.58,1765.98 ; R8.2 5165,1759.14 5158.16,1765.98 4701.58,1765.98 ; 3785,1765.98 4245,1765.98 ; 4245,1765.98 4701.58,1765.98
A0: U3.23
A3: U3.26
A4/SCL: U3.27
A5/SDA: U3.28
A6: U3.19
A7: U3.22
D2: U3.32
D3: U3.1
D4: U3.2
D5: U3.9
D6: U3.10
D7: U3.11
D8: U3.12
D9: U3.13
D10: U3.14
DTR: C8.1
GND: C1.1 C2.1 C3.1 C4.1 C5.1 C6.1 C7.1 C9.1 C10.1 C11.1 C12.1 C13.1 D4.2 D7.2 J1.4 J1.5 J1.6 J1.7 J1.8 J1.9 J1.10 J1.11 R9.1 R10.1 R11.1 R12.1 R13.1 R14.1 R?2.1 S6.1 S6.2 U2.1 U3.3 U3.5 U3.21 | length 2499.7
  Top Layer w10: C1.1 2357.4,1622.6 2370,1610 J1.8 J1.10 J1.11 J1.9 2690,1610 2702.6,1622.6 C2.1 ; J1.5 J1.7 ; R9.1 3330,1465.86 3335.86,1460 3787.93,1460 ; R10.1 3785,1462.93 3787.93,1460 ; R11.1 4245,1465 4240,1460 ; R12.1 4705,1460 ; R13.1 5165,1470 5155,1460 4705,1460 ; 3787.93,1460 4240,1460 ; 4240,1460 4705,1460
MISO: U3.16
MOSI: U3.15
NetC3_2: C3.2 D1.2
NetC4_2: C4.2 U1.7 Y1.1
NetC5_2: C5.2 U1.8 Y1.2
NetC7_2: C7.2 D5.2 U2.3
NetC11_2: C11.2 U3.20
NetC12_2: C12.2 U3.7 Y2.1
NetC13_2: C13.2 U3.8 Y2.2
NetD2_1: D2.1 R1.2
NetD3_1: D3.1 R2.2
NetD4_1: D4.1 R3.2
NetD6_2: D6.2 R14.2
NetD7_1: D7.1 R19.2
NetS1_1: S1.1 S1.2 S2.1 S2.2 S3.1 S3.2 S4.1 S4.2 S5.1 S5.2 | length 2162
  Top Layer w10: S1.2 S1.1 3733.24,1713.58 3753.2,1693.62 3839.55,1693.62 3859.51,1713.58 S2.2 S2.1 4193.24,1713.58 4213.2,1693.62 4299.55,1693.62 4319.51,1713.58 S3.2 S3.1 4653.24,1713.58 4673.2,1693.62 4764.55,1693.62 4784.51,1713.58 S4.2 S4.1 5113.24,1713.58 5133.2,1693.62 5224.55,1693.62 5244.51,1713.58 S5.2 S5.1
RESET: C8.2 S6.3 S6.4 U3.29
SCK: R19.1 U3.17
UART_RXD: D3.2 U1.3 U3.31
UART_TXD: D2.2 U1.2 U3.30
User_Key_1: R4.1 R9.2 S1.3 S1.4 | length 441
  Top Layer w10: R4.1 R9.2 3378.92,1567.4 3409.91,1536.42 S1.3 S1.4
User_Key_2: R5.1 R10.2 S2.3 S2.4 | length 441
  Top Layer w10: R5.1 R10.2 3833.92,1567.4 3864.91,1536.42 S2.3 S2.4
User_Key_3: R6.1 R11.2 S3.3 S3.4 | length 441
  Top Layer w10: R6.1 R11.2 4293.92,1567.4 4324.91,1536.42 S3.3 S3.4
User_Key_4: R7.1 R12.2 S4.3 S4.4 | length 446
  Top Layer w10: R7.1 R12.2 4758.92,1567.4 4789.91,1536.42 S4.3 S4.4
User_Key_5: R8.1 R13.2 S5.3 S5.4 | length 446
  Top Layer w10: R8.1 R13.2 5218.92,1567.4 5249.91,1536.42 S5.3 S5.4
VIN_ADC: R?1.1 R?2.2 U3.25
pads on no net: *1.1 *1.2 J1.2 J1.3 R?1.2 U1.1 U1.4 U1.5 U1.6 U1.9 U1.10 U1.11 U1.12 U1.13 U1.14 U1.15 U3.24
copper on no net: | length 524.7
  Top Layer w10: 2940,2425 3087.01,2425 ; 2940,2499.8 2940,2732.6 ; 2940,2807.4 3084.61,2807.4
  Top Layer w15: 3330,1569.8 3330.2,1570